# EAGLE board 7-Segment display and 74hc93 (EAGLE 9.7.0)

Size 218.78 x 103.49 mm. Coordinates in mm from the lower left corner, seen from the top.
Outline: 0,0 218.78,0 218.78,103.49 0,103.49 0,0
Copper layers (1*16): Top 0.035mm / dielectric 1.5mm / Bottom 0.035mm
Design rules "default": minimum track width 6mil, minimum drill 0.35mm, track to track 6mil, track to pad 6mil, pad to pad 6mil, via to via 6mil, smd to smd 6mil, copper to edge 40mil, drill to drill 6mil, minimum pad ring 10mil, minimum via ring 8mil, stop-mask expansion 4mil, vias tented up to drill 0mil, thermal gap 10mil

## Footprints (pad centres in the part's own frame; a part is rotated, then mirrored left to right if it is on the bottom)
BAT_3002 = smd 3.96 x 3.96: N 0,0.65 | smd 5.08 x 5.08: P 12.825,0.65; P1 -12.825,0.65
7SEG-13 = drill 0.813 long: 1 -5.08,-7.62; 2 -2.54,-7.62; 3 0,-7.62; 4 2.54,-7.62; 5 5.08,-7.62; 6 5.08,7.62; 7 2.54,7.62; 8 0,7.62; 9 -2.54,7.62; 10 -5.08,7.62
BATTERY-GENERIC = drill 1.118 pad 3.15 octagon: + 2.54,0; - -2.54,0
RESAD1016W63L850D250B = drill 0.83 pad 1.43: 1 -5.08,0; 2 5.08,0
SWITCH-MOMENTARY-PTH-6.5MM = drill 1.016 pad 1.88: 1 -3.251,2.261; 2 3.251,2.261; 3 -3.251,-2.261; 4 3.251,-2.261
DIP762W53P254L1969H508Q16B = drill 0.743 pad 1.343: 1 -3.81,8.89; 2 -3.81,6.35; 3 -3.81,3.81; 4 -3.81,1.27; 5 -3.81,-1.27; 6 -3.81,-3.81; 7 -3.81,-6.35; 8 -3.81,-8.89; 9 3.81,-8.89; 10 3.81,-6.35; 11 3.81,-3.81; 12 3.81,-1.27; 13 3.81,1.27; 14 3.81,3.81; 15 3.81,6.35; 16 3.81,8.89
DIP762W53P254L1969H508Q14B = drill 0.743 pad 1.343: 1 -3.81,7.62; 2 -3.81,5.08; 3 -3.81,2.54; 4 -3.81,0; 5 -3.81,-2.54; 6 -3.81,-5.08; 7 -3.81,-7.62; 8 3.81,-7.62; 9 3.81,-5.08; 10 3.81,-2.54; 11 3.81,0; 12 3.81,2.54; 13 3.81,5.08; 14 3.81,7.62

## Placement (x,y rotation side)
BAT1  BR2016  [BAT_3002]  83.98,83.3 90 top
DIGIT1  7SEG-CA  [7SEG-13]  209.51,14.1 0 top
P1  BATTERYGENERIC  [BATTERY-GENERIC]  8.26,54 180 top
R1  220  [RESAD1016W63L850D250B]  207.62,79.54 90 top
R2  220  [RESAD1016W63L850D250B]  182.22,79.54 90 top
S1  SWITCH_MOMENTARY  [SWITCH-MOMENTARY-PTH-6.5MM]  151.74,73.19 90 top
U1  CD4511_PDIP  [DIP762W53P254L1969H508Q16B]  191.11,63.03 90 top
U2  74HC93_PDIP  [DIP762W53P254L1969H508Q14B]  161.9,63.03 90 top

## Library data of the parts
BAT1 = Tinkercad; CATEGORY: Battery-Holder; CELL_DIAMETER: 20mm; DESCRIPTION: Battery Retainer Coin, 20.0mm 1 Cell SMD (SMT) Tab; MANUFACTURER: Keystone Electronics; MPN: 3002; PART_STATUS: ACTIVE; ROHS_COMPLIANT: COMPLIANT; SERIES: -; SUB_CATEGORY: Holder; TYPE: Coin Cell
DIGIT1 = Tinkercad; CATEGORY: Opto-Electronic; SUB-CATEGORY: Display; TYPE: 7-Segment
P1 R1 R2 S1 U1 U2 = Tinkercad

## Nets
BAT1+: BAT1.P BAT1.P1 R1.2 R2.2 S1.1 S1.2 U1.3 U1.4 U2.5
BAT1-: BAT1.N U1.8 U2.2 U2.3 U2.10
DIGIT1_CA2: DIGIT1.8 R1.1
U1_A: DIGIT1.7 U1.13
U1_B: DIGIT1.6 U1.12
U1_C: DIGIT1.4 U1.11
U1_D: DIGIT1.2 U1.10
U1_E: DIGIT1.1 U1.9
U1_F: DIGIT1.9 U1.15
U1_G: DIGIT1.10 U1.14
U1_VDD: R2.1 U1.16
U2_!CP0: S1.3 S1.4 U2.14
U2_!CP1: U1.7 U2.1 U2.12
U2_Q1: U1.1 U2.9
U2_Q2: U1.2 U2.8
U2_Q3: U1.6 U2.11

## Tracks (layer width: path | path; a pad name or v marks a point on that pad's centre or on a via)
BAT1+  (8 unrouted)
BAT1-  (4 unrouted)
DIGIT1_CA2  (1 unrouted)
U1_A  (1 unrouted)
U1_B  (1 unrouted)
U1_C  (1 unrouted)
U1_D  (1 unrouted)
U1_E  (1 unrouted)
U1_F  (1 unrouted)
U1_G  (1 unrouted)
U1_VDD  (1 unrouted)
U2_!CP0  (2 unrouted)
U2_!CP1  (2 unrouted)
U2_Q1  (1 unrouted)
U2_Q2  (1 unrouted)
U2_Q3  (1 unrouted)